# EAGLE board Avionis Final v14 (EAGLE 9.7.0)
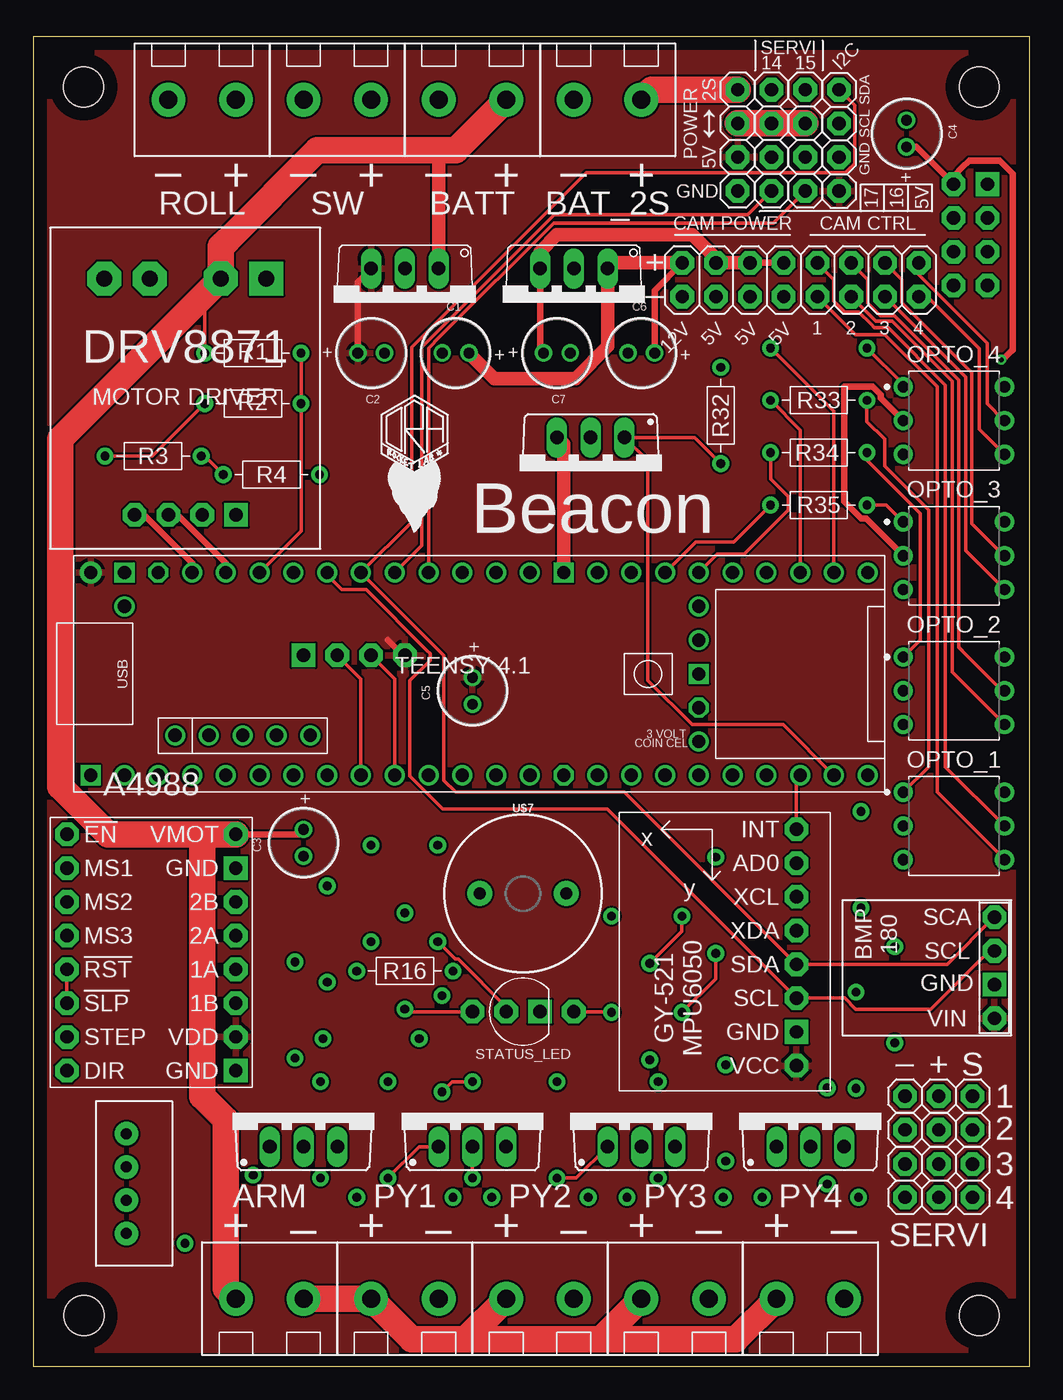
[diagram p0: board, top side]
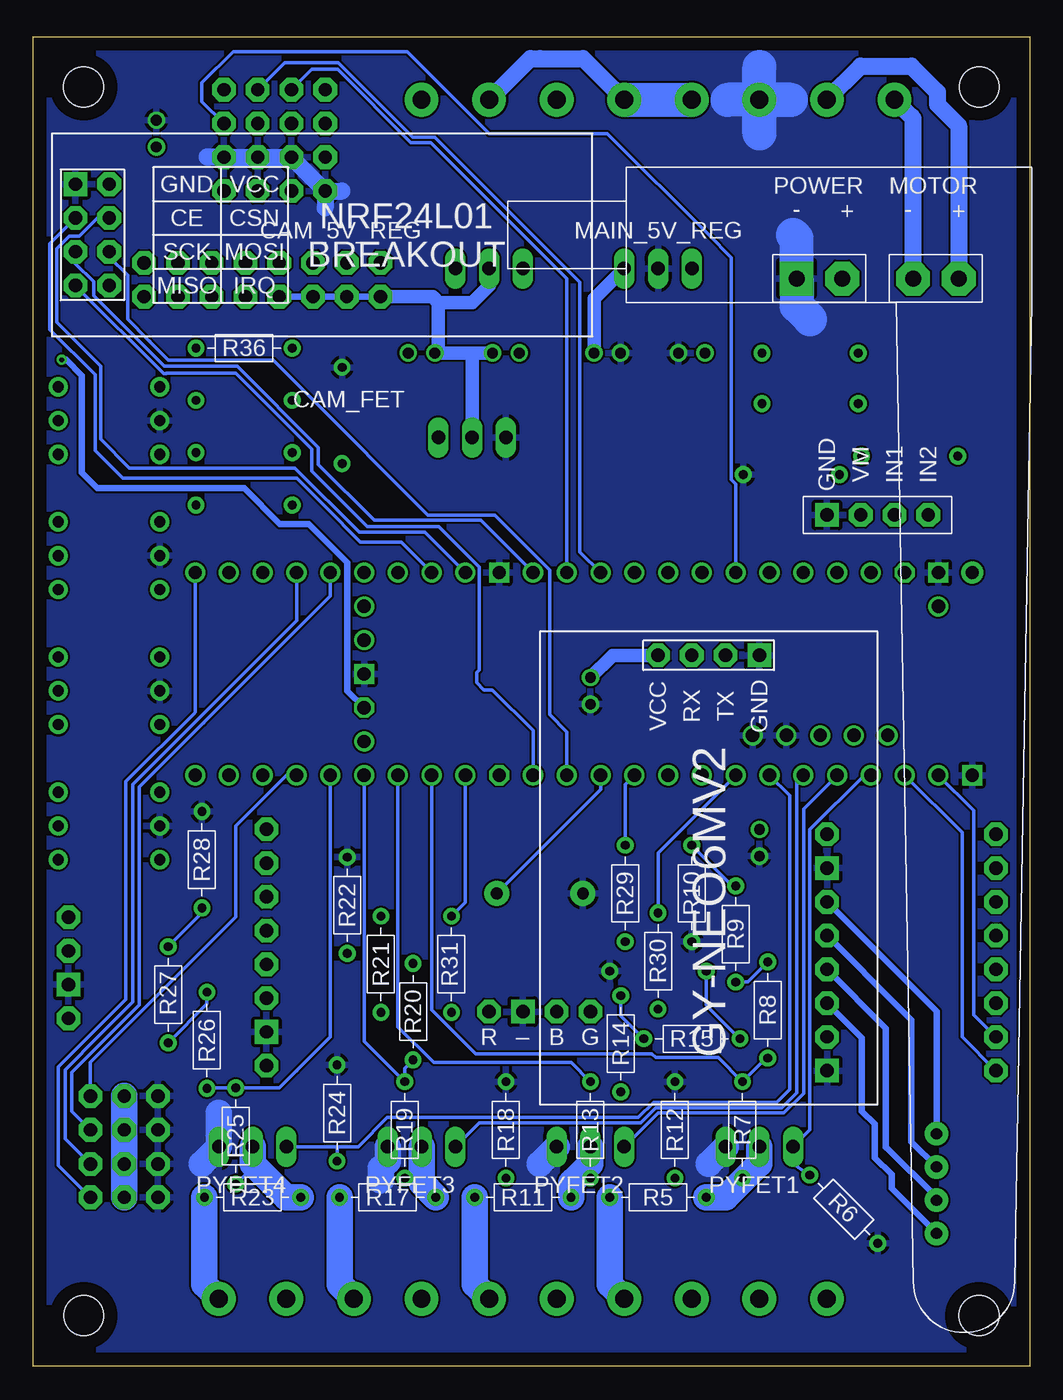
[diagram p1: board, bottom side, seen from below]

Size 74.91 x 100 mm. Coordinates in mm from the lower left corner, seen from the top.
Outline: 0,0 74.91,0 74.91,100 0,100 0,0
Copper layers (1*16): Top 0.035mm / dielectric 1.5mm / Bottom 0.035mm
Design rules "Fusion Electronics Design Rules": minimum track width 0.25mm, minimum drill 0.35mm, track to track 6mil, track to pad 6mil, pad to pad 6mil, via to via 6mil, smd to smd 6mil, copper to edge 40mil, drill to drill 6mil, minimum pad ring 10mil, minimum via ring 8mil, stop-mask expansion 4mil, vias tented up to drill 0mil, thermal gap 10mil
Holes 3 mm at 3.81,3.81 71.12,3.81 3.79,96.21 71.12,96.21

## Footprints (pad centres in the part's own frame; a part is rotated, then mirrored left to right if it is on the bottom)
TERMBLK_2_LOW = drill 1.35 pad 2.54: + 5.08,0; - 0,0
WCAP-AT1H_5X11(DXL) = drill 0.8: 1 1,0; 2 -1,0
TO220V = drill 1.016 long: 1 -2.54,-2.54; 2 0,-2.54; 3 2.54,-2.54
2X08 = drill 1 pad 1.778 octagon: 1 -8.89,-1.27; 2 -8.89,1.27; 3 -6.35,-1.27; 4 -6.35,1.27; 5 -3.81,-1.27; 6 -3.81,1.27; 7 -1.27,-1.27; 8 -1.27,1.27; 9 1.27,-1.27; 10 1.27,1.27; 11 3.81,-1.27; 12 3.81,1.27; 13 6.35,-1.27; 14 6.35,1.27; 15 8.89,-1.27; 16 8.89,1.27
TO220BV = drill 1.016 long: D 0,-2.54; G -2.54,-2.54; S 2.54,-2.54
1X04 = drill 1 pad 1.778 octagon: 1 -3.81,0; 2 -1.27,0; 3 1.27,0; 4 3.81,0
DIP762W60P254L712H480Q6B = drill 0.85 pad 1.45: 1 -3.81,2.54; 2 -3.81,0; 3 -3.81,-2.54; 4 3.81,-2.54; 5 3.81,0; 6 3.81,2.54
RESAD724W46L381D178B = drill 0.66 pad 1.26: 1 -3.62,0; 2 3.62,0
1X03 = drill 1 pad 1.778 octagon: 1 -2.54,0; 2 0,0; 3 2.54,0
LED_RGB_CAT_THT = drill 1 pad 1.778 square: - 1.27,0 | drill 1 pad 1.778 octagon: B -1.27,0; G -3.81,0; R 3.81,0
B4B-XH-A = drill 0.84 pad 1.778: 1 0,0; 2 2.5,0; 3 5,0; 4 7.5,0
GY-521 = drill 1 pad 1.778 octagon: ADO -8.89,-6.35; INT -8.89,-8.89; SCL -8.89,3.81; SDA -8.89,1.27; VCC -8.89,8.89; XCL -8.89,-3.81; XDA -8.89,-1.27 | drill 1 pad 1.778 square: GND -8.89,6.35
TENNSY41-E = drill 1: 0-RX1/CS1/CRX2 -27.94,-7.62; 1-TX1/MISO1/CTX2 -25.4,-7.62; 2-OUT2 -22.86,-7.62; 3-LRCLK2 -20.32,-7.62; 4-BCLK2 -17.78,-7.62; 5-IN2 -15.24,-7.62; 6-OUT1D -12.7,-7.62; 7-RX2/OUT1A -10.16,-7.62; 8-TX2/IN1 -7.62,-7.62; 9-OUT1C -5.08,-7.62; 10-CS\MQSR -2.54,-7.62; 11-MOSI/CTX1 0,-7.62; 12-MISO/MQSL 2.54,-7.62; 13-SCK/LED 2.54,7.62; 14-A0/TX3/SPDIF_OUT 0,7.62; 15-A1/RX3/SPDIF_IN -2.54,7.62; 16-A2/RX4/SCL1 -5.08,7.62; 17-A3/TX4/SDA1 -7.62,7.62; 18-A4/SDA0 -10.16,7.62; 19-A5/SCL0 -12.7,7.62; 20-A6/TX5/LRCLK1 -15.24,7.62; 21-A7/RX5/BCLK1 -17.78,7.62; 22-A8/CTX1 -20.32,7.62; 23-A9/CRX1/MCLK1 -22.86,7.62; 24-A10/TX6/SCL2 7.62,-7.62; 25-A11/RX6/SDA2 10.16,-7.62; 26-A12/MOSI1 12.7,-7.62; 27-A13/SCK1 15.24,-7.62; 28-RX7 17.78,-7.62; 29-TX7 20.32,-7.62; 30-CRX3 22.86,-7.62; 31-CTX3 25.4,-7.62; 32-OUT1B 27.94,-7.62; 33-MCLK2 27.94,7.62; 34-RX8 25.4,7.62; 35-TX8 22.86,7.62; 36-PWM 20.32,7.62; 37-PWM 17.78,7.62; 38-A14/CS/IN1 15.24,7.62; 39-A15/CS/OUT1A 12.7,7.62; 40-A16/CS1 10.16,7.62; 41-A17/MISO1 7.62,7.62; +5V -24.13,-4.62; DM -21.59,-4.62; DP -19.05,-4.62; GND4 -16.51,-4.62; GND5 -13.97,-4.62; ON/OFF 15.24,5.08; PROGRAM 15.24,2.54; VBAT 15.24,-5.08; VUSB -27.94,5.08 | drill 1 octagon: 3V3-1 5.08,-7.62; 3V3-2 15.24,-2.54; 3V3-3 -25.4,7.62 | drill 1 square: GND1 -30.48,-7.62; GND2 15.24,0; GND3 5.08,7.62; GND6 -27.94,7.62 | drill 1 pad 1.676: VIN -30.48,7.62
NRF24L01_BREAKOUT = drill 1 pad 1.778 octagon: CE 6.35,1.778; CSN 6.35,4.318; IRQ 11.43,4.318; MISO 11.43,1.778; MOSI 8.89,4.318; SCK 8.89,1.778; VCC 3.81,4.318 | drill 1 pad 1.778 square: GND 3.81,1.778
GY-NEO6MV2 = drill 1 pad 1.778 square: GND 8.89,1.778 | drill 1 pad 1.778 octagon: RX 13.97,1.778; TX 11.43,1.778; VCC 16.51,1.778
GY-68_BMP180 = drill 1 pad 1.778 square: GND 3.81,1.27 | drill 1 pad 1.778 octagon: SCL 6.35,1.27; SDA 8.89,1.27; VIN 1.27,1.27
DRV8871_MOTORDRIVER = drill 1 pad 1.778 square: GND 13.97,2.54 | drill 1 pad 1.778 octagon: IN1 8.89,2.54; IN2 6.35,2.54; VM 11.43,2.54 | drill 1.2 pad 2.54 octagon: MOT+ 4.064,20.32; MOT- 7.493,20.32; POWER+ 12.827,20.32 | drill 1.2 pad 2.54 square: POWER- 16.256,20.32
A4988 = drill 1 pad 1.778 octagon: 1A 6.35,-1.27; 1B 6.35,-3.81; 2A 6.35,1.27; 2B 6.35,3.81; !EN -6.35,8.89; !RST -6.35,-1.27; !SLP -6.35,-3.81; DIR -6.35,-8.89; MS1 -6.35,6.35; MS2 -6.35,3.81; MS3 -6.35,1.27; STEP -6.35,-6.35; VDD 6.35,-6.35; VMOT 6.35,8.89 | drill 1 pad 1.778 square: GND1 6.35,-8.89; GND2 6.35,6.35
BUZZER-12MM-KIT = drill 0.9 pad 1.88: + 3.25,0; - -3.25,0

## Placement (x,y rotation side)
ARM  TERMBLK_2  [TERMBLK_2_LOW]  20.32,5.08 180 top
BAT_2S  TERMBLK_2  [TERMBLK_2_LOW]  40.64,95.25 0 top
BATT  TERMBLK_2  [TERMBLK_2_LOW]  30.48,95.25 0 top
C1  10µF  [WCAP-AT1H_5X11(DXL)]  31.75,76.2 0 top
C2  1µF  [WCAP-AT1H_5X11(DXL)]  25.4,76.2 180 top
C3  100µF  [WCAP-AT1H_5X11(DXL)]  20.32,39.37 90 top
C4  10µF  [WCAP-AT1H_5X11(DXL)]  65.66,92.71 270 top
C5  10µF  [WCAP-AT1H_5X11(DXL)]  33.02,50.8 90 top
C6  10µF  [WCAP-AT1H_5X11(DXL)]  45.72,76.2 0 top
C7  1µF  [WCAP-AT1H_5X11(DXL)]  39.37,76.2 180 top
CAM_5V_REG  LM7805_TO220V  [TO220V]  40.64,80.01 180 top
CAM_BREAKOUTS  CAM_BK  [2X08]  57.69,81.71 0 top
CAM_FET  NMOSFET  [TO220BV]  41.91,67.31 180 top
I2C_BK  I2C  [1X04]  60.58,92.2 90 top
MAIN_5V_REG  LM7805_TO220V  [TO220V]  27.94,80.01 180 top
OPTO_1  4N28  [DIP762W60P254L712H480Q6B]  69.22,40.64 0 top
OPTO_2  4N28  [DIP762W60P254L712H480Q6B]  69.22,50.8 0 top
OPTO_3  4N28  [DIP762W60P254L712H480Q6B]  69.22,60.96 0 top
OPTO_4  4N28  [DIP762W60P254L712H480Q6B]  69.22,71.12 0 top
POWER_BK  POWER  [1X04]  52.96,92.2 270 top
PY1  TERMBLK_2  [TERMBLK_2_LOW]  30.48,5.08 180 top
PY2  TERMBLK_2  [TERMBLK_2_LOW]  40.64,5.08 180 top
PY3  TERMBLK_2  [TERMBLK_2_LOW]  50.8,5.08 180 top
PY4  TERMBLK_2  [TERMBLK_2_LOW]  60.96,5.08 180 top
PYFET1  NMOSFET  [TO220BV]  20.32,19.05 0 top
PYFET2  NMOSFET  [TO220BV]  33.02,19.05 0 top
PYFET3  NMOSFET  [TO220BV]  45.72,19.05 0 top
PYFET4  NMOSFET  [TO220BV]  58.42,19.05 0 top
R1  1M  [RESAD724W46L381D178B]  16.51,76.2 0 top
R2  100k  [RESAD724W46L381D178B]  16.51,72.39 0 top
R3  100k  [RESAD724W46L381D178B]  9.02,68.45 0 top
R4  100k  [RESAD724W46L381D178B]  17.91,67.06 180 top
R5  1ohm  [RESAD724W46L381D178B]  27.94,12.7 0 bottom
R6  470ohm  [RESAD724W46L381D178B]  13.97,11.81 315 bottom
R7  1M  [RESAD724W46L381D178B]  21.59,17.78 90 bottom
R8  100k  [RESAD724W46L381D178B]  19.68,26.8 270 bottom
R9  100k  [RESAD724W46L381D178B]  22.1,32.51 270 bottom
R10  100k  [RESAD724W46L381D178B]  25.4,35.56 90 bottom
R11  1ohm  [RESAD724W46L381D178B]  38.1,12.7 0 bottom
R12  470ohm  [RESAD724W46L381D178B]  26.67,17.78 90 bottom
R13  1M  [RESAD724W46L381D178B]  33.02,17.78 90 bottom
R14  100k  [RESAD724W46L381D178B]  30.73,24.26 270 bottom
R15  100k  [RESAD724W46L381D178B]  25.4,24.64 180 bottom
R16  100k  [RESAD724W46L381D178B]  27.94,29.72 180 top
R17  1ohm  [RESAD724W46L381D178B]  48.26,12.7 0 bottom
R18  470ohm  [RESAD724W46L381D178B]  39.37,17.78 90 bottom
R19  1M  [RESAD724W46L381D178B]  46.99,17.78 90 bottom
R20  100k  [RESAD724W46L381D178B]  46.35,26.67 270 bottom
R21  100k  [RESAD724W46L381D178B]  48.77,30.23 90 bottom
R22  100k  [RESAD724W46L381D178B]  51.31,34.67 270 bottom
R23  1ohm  [RESAD724W46L381D178B]  58.42,12.7 0 bottom
R24  470ohm  [RESAD724W46L381D178B]  52.07,19.05 90 bottom
R25  1M  [RESAD724W46L381D178B]  59.69,17.31 90 bottom
R26  100k  [RESAD724W46L381D178B]  61.85,24.51 270 bottom
R27  100k  [RESAD724W46L381D178B]  64.77,27.94 270 bottom
R28  100k  [RESAD724W46L381D178B]  62.23,38.1 270 bottom
R29  68ohm  [RESAD724W46L381D178B]  30.41,35.56 90 bottom
R30  68ohm  [RESAD724W46L381D178B]  27.94,30.48 90 bottom
R31  10ohm  [RESAD724W46L381D178B]  43.47,30.23 90 bottom
R32  470ohm  [RESAD724W46L381D178B]  51.69,71.5 90 top
R33  100ohm  [RESAD724W46L381D178B]  59.05,72.64 0 top
R34  100ohm  [RESAD724W46L381D178B]  59.05,68.71 0 top
R35  100ohm  [RESAD724W46L381D178B]  59.05,64.77 0 top
R36  100ohm  [RESAD724W46L381D178B]  59.05,76.58 180 bottom
ROLL  TERMBLK_2  [TERMBLK_2_LOW]  10.16,95.25 0 top
SERVO_BK_1  SERVO_1  [1X04]  55.5,92.2 270 top
SERVO_BK_2  SERVO_2  [1X04]  58.04,92.2 270 top
SERVO_HD_1  PINHD-1X3  [1X03]  68.07,20.32 0 top
SERVO_HD_2  PINHD-1X3  [1X03]  68.07,17.78 0 top
SERVO_HD_3  PINHD-1X3  [1X03]  68.07,15.21 0 top
SERVO_HD_4  PINHD-1X3  [1X03]  68.07,12.7 0 top
STATUS_LED  LED_RGB_CAT_THT  [LED_RGB_CAT_THT]  36.83,26.67 0 top
STEPPER_BK  STEPPER  [B4B-XH-A]  7,17.49 270 top
SW  TERMBLK_2  [TERMBLK_2_LOW]  20.32,95.25 0 top
U1  GY-521MPU6050  [GY-521]  48.49,31.5 180 top
U$1  TEENSY41-E  [TENNSY41-E]  34.8,52.07 0 top
U$2  NRF24L01_BREAKOUT  [NRF24L01_BREAKOUT]  73.51,92.71 270 bottom
U$3  GY-NEO6MV2  [GY-NEO6MV2]  11.43,55.24 180 bottom
U$4  GY-68_BMP180  [GY-68_BMP180]  73.53,24.89 90 top
U$5  DRV8871_MOTORDRIVER  [DRV8871_MOTORDRIVER]  1.27,61.49 0 top
U$6  A4988  [A4988]  8.88,31.11 0 top
U$7  BUZZER_12MM  [BUZZER-12MM-KIT]  36.83,35.56 0 top

## Library data of the parts
ARM BAT_2S BATT PY1-PY4 ROLL SW = TERMINAL BLOCK
C1-C7 = Wurth_Capacitors_WCAP-AT1H; DATASHEET-URL: https://www.we-online.com/catalog/datasheet/860240672002.pdf; DF: 10%; DIAMETER: 5mm; I-LEAK: 5uA; I-RIPPLE: 97mA; L: 11mm; OPERATING-TEMPERATURE: -40 °C up to +105 °C; PART-NUMBER: 860240672002; PITCH: 2mm; TECHNICAL-REFERENCE: ATDC110100M050DSPA3E000; VR: 50V(DC)
CAM_5V_REG MAIN_5V_REG = IC_Power-Management; CATEGORY: IC_Linear; DESCRIPTION: 5V Voltage Regulator; MANUFACTURER: Generic; MPN: Generic; SERIES: LM7805; SUB-CATEGORY: Voltage Regulator; TYPE: 5V
CAM_BREAKOUTS = My connectors; CATEGORY: Headers; DESCRIPTION: Header, Straight, 2x8 Position; MANUFACTURER: Generic; MPN: Generic; OPERATING_TEMPERATURE: Generic; PART_STATUS: Active; PITCH: 0.100" (2.54mm); ROHS_COMPLIANCE: Generic; SERIES: Generic; SUB-CATEGORY: Headers, Male Pins; TYPE: Board to Board or Cable, Unshrouded, Through Hole, Straight
CAM_FET PYFET1-PYFET4 = Transistor; CATEGORY: Transistor; SUB-CATEGORY: MOSFET; TYPE: N-Channel
I2C_BK POWER_BK SERVO_BK_1 SERVO_BK_2 = My connectors; CATEGORY: Headers; DESCRIPTION: Header, Straight, 4 Position; MANUFACTURER: Generic; MPN: Generic; OPERATING_TEMPERATURE: Generic; PART_STATUS: Active; PITCH: 0.100" (2.54mm); ROHS_COMPLIANCE: Generic; SERIES: Generic; SUB-CATEGORY: Headers, Male Pins; TYPE: Board to Board or Cable, Unshrouded, Through Hole, Straight
OPTO_1-OPTO_4 = Opto-Electronic; CATEGORY: Opto-Electronic; DESCRIPTION: Optoisolator Transistor with Base Output 5000Vrms Channel 6-DIP; MANUFACTURER: Vishay; MPN: 4N28; OPERATING_TEMP: - 55°C to + 100 °C; PART_STATUS: Active; ROHS_COMPLIANT: COMPLIANT; SERIES: 4N2x; SUB-CATEGORY: Optocoupler; THERMALLOSS: 0.150 W
R1-R36 = My Resistors and Pot; CATEGORY: Resistor; SUB-CATEGORY: Fixed
SERVO_HD_1-SERVO_HD_4 = My connectors; CATEGORY: Headers; DESCRIPTION: Header, Straight, 3 Position; MANUFACTURER: Generic; MPN: Generic; OPERATING_TEMPERATURE: Generic; PART_STATUS: Active; PITCH: 0.100" (2.54mm); ROHS_COMPLIANCE: Generic; SERIES: Generic; SUB-CATEGORY: Headers, Male Pins; TYPE: Board to Board or Cable, Unshrouded, Through Hole, Straight
STATUS_LED = LED_RGB_CAT
STEPPER_BK = My connectors; CATEGORY: Header; DSECRIPTION: Connector Header Through Hole 4 position 0.098" (2.50mm); MANUFACTURER: JST Sales America Inc.; MPN: B4B-XH-A(LF)(SN); OPERATING_TEMPERATURE: -25 C to 85 C; PART_STATUS: ACTIVE; PITCH: 0.098" (2.50mm); ROHS_COMPLIANCE: ROHS3 Compliant; SERIES: XH; SUB_CATEGORY: Rectangular Connectors; TYPE: Header, Male Pin, Board to Cable/Wire, Through Hole
U1 = GY-521_MPU6050
U$1 = TEENSY41
U$2 = NRF24L01_BREAKOUT
U$3 = GY-NEO6MV2
U$4 = GY-68_BMP180
U$5 = DRV8871_MOTORDRIVER
U$6 = A4988
U$7 = Buzzer 12mm Ora

## Nets
1A: STEPPER_BK.3 U$6.1A
1B: STEPPER_BK.4 U$6.1B
2A: STEPPER_BK.2 U$6.2A
2B: STEPPER_BK.1 U$6.2B
2S_BAT: BAT_2S.+ POWER_BK.1
3V3: C4.1 U$1.3V3-2 U$2.VCC
5V: C2.1 C5.1 I2C_BK.1 MAIN_5V_REG.3 POWER_BK.3 U1.VCC U$1.VIN U$3.VCC U$4.VIN U$6.VDD
5V_CAM: C7.1 CAM_5V_REG.3 CAM_BREAKOUTS.4 CAM_BREAKOUTS.6 CAM_BREAKOUTS.8
12V: ARM.+ BATT.+ C1.1 C3.1 C6.1 CAM_5V_REG.1 CAM_BREAKOUTS.2 MAIN_5V_REG.1 R1.1 U$5.POWER+ U$6.VMOT
12V_PYRO_SWITCH: ARM.- PY1.+ PY2.+ PY3.+ PY4.+
!RST: U$6.!RST U$6.!SLP
BATT-: BAT_2S.- BATT.- SW.+
BRK_14: SERVO_BK_1.1 U$1.14-A0/TX3/SPDIF_OUT
BRK_15: SERVO_BK_2.1 U$1.15-A1/RX3/SPDIF_IN
BRK_16: SERVO_BK_2.4 U$1.16-A2/RX4/SCL1
BRK_17: SERVO_BK_1.4 U$1.17-A3/TX4/SDA1
BUZZER: U$1.10-CS\MQSR U$7.+
CAM1: R33.1 U$1.35-TX8
CAM1+: CAM_BREAKOUTS.10 OPTO_1.5
CAM1-: CAM_BREAKOUTS.9 OPTO_1.4
CAM2: R34.1 U$1.38-A14/CS/IN1
CAM2+: CAM_BREAKOUTS.12 OPTO_2.5
CAM2-: CAM_BREAKOUTS.11 OPTO_2.4
CAM3: R35.1 U$1.39-A15/CS/OUT1A
CAM3+: CAM_BREAKOUTS.14 OPTO_3.5
CAM3-: CAM_BREAKOUTS.13 OPTO_3.4
CAM4: R36.1 U$1.34-RX8
CAM4+: CAM_BREAKOUTS.16 OPTO_4.5
CAM4-: CAM_BREAKOUTS.15 OPTO_4.4
CAM_ON: CAM_FET.G R32.1 U$1.31-CTX3
CE: U$1.40-A16/CS1 U$2.CE
CSN: U$1.41-A17/MISO1 U$2.CSN
DIR: U$1.1-TX1/MISO1/CTX2 U$6.DIR
GND: C1.2 C2.2 C3.2 C4.2 C5.2 CAM_FET.S I2C_BK.2 MAIN_5V_REG.2 OPTO_1.2 OPTO_2.2 OPTO_3.2 OPTO_4.2 POWER_BK.4 PYFET1.S PYFET2.S PYFET3.S PYFET4.S R4.1 R6.2 R10.1 R12.2 R16.1 R18.2 R22.1 R24.2 R28.1 R32.2 SERVO_BK_1.3 SERVO_BK_2.3 SERVO_HD_1.1 SERVO_HD_2.1 SERVO_HD_3.1 SERVO_HD_4.1 STATUS_LED.- SW.- U1.GND U$1.GND1 U$1.GND2 U$1.GND3 U$1.GND4 U$1.GND5 U$1.GND6 U$2.GND U$3.GND U$4.GND U$5.GND U$5.POWER- U$6.GND1 U$6.GND2 U$7.-
GND_CAM: C6.2 C7.2 CAM_5V_REG.2 CAM_BREAKOUTS.1 CAM_BREAKOUTS.3 CAM_BREAKOUTS.5 CAM_BREAKOUTS.7 CAM_FET.D
LED_BLU: R29.2 U$1.9-OUT1C
LED_GRE: R30.2 U$1.6-OUT1D
LED_RED: R31.2 U$1.24-A10/TX6/SCL2
MISO: U$1.12-MISO/MQSL U$2.MISO
MOSI: U$1.11-MOSI/CTX1 U$2.MOSI
MOT_1: U$1.22-A8/CTX1 U$5.IN1
MOT_2: U$1.23-A9/CRX1/MCLK1 U$5.IN2
MPU_INT: U1.INT U$1.30-CRX3
N$1: ROLL.+ U$5.MOT+
N$2: ROLL.- U$5.MOT-
N$3: PY2.- R11.1
N$4: PYFET2.D R11.2 R13.1
N$5: R15.1 R16.2
N$6: R14.1 R15.2
N$7: PY3.- R17.1
N$8: PY1.- R5.1
N$9: R9.1 R10.2
N$10: PYFET1.D R5.2 R7.1
N$11: R2.1 R3.1
N$12: R3.2 R4.2
N$13: R8.1 R9.2
N$14: PYFET3.D R17.2 R19.1
N$15: R21.1 R22.2
N$16: R20.1 R21.2
N$17: PY4.- R23.1
N$18: PYFET4.D R23.2 R25.1
N$19: R27.1 R28.2
N$20: R26.1 R27.2
N$21: R30.1 STATUS_LED.G
N$22: R31.1 STATUS_LED.R
N$23: OPTO_1.1 R33.2
N$24: R29.1 STATUS_LED.B
N$25: OPTO_2.1 R34.2
N$26: OPTO_3.1 R35.2
N$27: OPTO_4.1 R36.2
PY_CTY1: R7.2 R8.2 U$1.25-A11/RX6/SDA2
PY_CTY2: R13.2 R14.2 U$1.26-A12/MOSI1
PY_CTY3: R19.2 R20.2 U$1.27-A13/SCK1
PY_CTY4: R25.2 R26.2 U$1.28-RX7
PYRO1: PYFET1.G R6.1 U$1.2-OUT2
PYRO2: PYFET2.G R12.1 U$1.3-LRCLK2
PYRO3: PYFET3.G R18.1 U$1.4-BCLK2
PYRO4: PYFET4.G R24.1 U$1.5-IN2
RX: U$1.7-RX2/OUT1A U$3.TX
SCK: U$1.13-SCK/LED U$2.SCK
SCL: I2C_BK.3 U1.SCL U$1.19-A5/SCL0 U$4.SCL
SDA: I2C_BK.4 U1.SDA U$1.18-A4/SDA0 U$4.SDA
SERVO_1: SERVO_HD_1.3 U$1.29-TX7
SERVO_2: SERVO_HD_2.3 U$1.37-PWM
SERVO_3: SERVO_HD_3.3 U$1.36-PWM
SERVO_4: SERVO_HD_4.3 U$1.33-MCLK2
SERVO_POW: SERVO_HD_1.2 SERVO_HD_2.2 SERVO_HD_3.2 SERVO_HD_4.2
SERVO_V: POWER_BK.2 SERVO_BK_1.2 SERVO_BK_2.2
STEP: U$1.0-RX1/CS1/CRX2 U$6.STEP
TX: U$1.8-TX2/IN1 U$3.RX
V_BATT: R1.2 R2.2 U$1.21-A7/RX5/BCLK1

## Tracks (layer width: path | path; a pad name or v marks a point on that pad's centre or on a via)
1A
  Bottom 0.5: U$6.1A 10.81,25.43 10.81,16.51 | 10.81,16.51 10.81,16.46 | 10.81,16.51 7,12.7 STEPPER_BK.3
1B
  Bottom 0.5: U$6.1B 12.61,24.68 12.61,19.19 11.65,18.23 11.65,15.69 10.38,14.42 10.38,13.37 STEPPER_BK.4
2A
  Bottom 0.5: U$6.2A 9.65,26.81 9.65,26.8 8.89,26.04 8.89,16.88 STEPPER_BK.2
2B
  Bottom 0.5: U$6.2B 7,26.7 STEPPER_BK.1
2S_BAT
  Top 2: BAT_2S.+ 46.48,96.01 POWER_BK.1
3V3  (via drill 0.35)
  Top 0.5: C4.1 66.39,91.71 U$2.VCC 69.19,89.52 69.85,90.17 70.36,90.68 72.64,90.68 73.64,89.68 73.64,77.47 73.64,76.45 | 73.64,76.45 73.64,76.44 | 73.64,76.45 72.88,75.69 v72.77,75.69
  Bottom 0.5: U$1.3V3-2 51.31,50.8 51.31,60.45 54.21,63.36 56.37,63.36 59.05,66.04 70.1,66.04 71.26,67.2 71.26,74.51 72.45,75.69 v72.77,75.69
5V
  Top 0.5: MAIN_5V_REG.3 24.4,81.55 C2.1 | U$3.VCC 27.81,53.47 26.67,54.61
  Bottom 1: U$3.VCC 31.35,53.47 C5.1
  pour Top: -2.29,97.54 -2.29,5.33 3.86,5.33 3.95,5.29 4.02,5.22 4.06,5.13 4.06,0.25 70.87,0.25 70.87,5.13 70.91,5.22 70.98,5.29 71.07,5.33 75.95,5.33 75.95,97.54 71.07,97.54 70.98,97.58 70.91,97.65 70.87,97.74 70.87,101.35 4.06,101.35 4.06,97.74 4.02,97.65 3.95,97.58 3.86,97.54
5V_CAM
  Top 0.5: CAM_BREAKOUTS.6 CAM_BREAKOUTS.8 | 38.37,82.28 CAM_5V_REG.3 38.1,76.47 C7.1
  Top 1: CAM_BREAKOUTS.6 CAM_BREAKOUTS.4 51.34,83.28 49.53,85.09 39.37,85.09 38.1,83.82 CAM_5V_REG.3
12V
  Top 0.25: R1.1 12.89,80.6 U$5.POWER+
  Top 0.5: C6.1 46.72,80.91 CAM_BREAKOUTS.2 | U$6.VMOT 19.95,40.01 C3.1
  Top 1: 30.48,91.44 MAIN_5V_REG.1 | CAM_BREAKOUTS.2 43.61,82.98 CAM_5V_REG.1 43.18,76.71 40.77,74.3 34.66,74.3 C1.1
  Top 2: BATT.+ 31.75,91.44 30.48,91.44 24.13,91.44 21.34,91.44 14.61,84.71 14.1,84.2 U$5.POWER+ 2.02,69.72 2.02,44.45 2.02,43.61 5.62,40.01 12.7,40.01 | 12.7,40.01 U$6.VMOT | 12.7,40.01 12.7,20.3 14.46,18.54 14.46,11.94 14.46,5.86 ARM.+
  Bottom 1: MAIN_5V_REG.1 32.75,80.28 C1.1
12V_PYRO_SWITCH
  Top 2: ARM.- PY1.+ 28.46,2.02 30.48,2.02 | 30.48,2.02 41.91,2.02 | 41.91,2.02 52.07,2.02 52.82,2.02 PY4.+ | PY3.+ 42.66,2.02 41.91,2.02 | PY2.+ 32.5,2.02 30.48,2.02
!RST
  Top 0.25: U$6.!RST U$6.!SLP
BATT-
  Bottom 1.27: BAT_2S.- 37.54,98.35 36.83,98.35 33.58,98.35 BATT.-
  Bottom 2.54: BATT.- SW.+
BRK_14
  Bottom 0.25: SERVO_BK_1.1 53.98,97.54 53.21,97.54 52.03,97.54 46.53,92.03 45.04,92.03 34.92,81.92 34.8,81.79 U$1.14-A0/TX3/SPDIF_OUT
BRK_15
  Bottom 0.25: SERVO_BK_2.1 56.01,98.04 53.21,98.04 51.97,98.04 46.36,92.43 44.72,92.43 34.57,82.27 33.82,81.53 33.82,61.25 U$1.15-A1/RX3/SPDIF_IN
BRK_16
  Top 0.25: U$1.16-A2/RX4/SCL1 29.72,76.53 29.72,76.58 30.57,77.44 39.12,85.98 53.34,85.98 55.63,85.98 SERVO_BK_2.4
BRK_17
  Top 0.25: U$1.17-A3/TX4/SDA1 29.21,61.72 29.21,76.64 30.26,77.69 39.18,86.61 39.62,86.61 53.72,86.61 SERVO_BK_1.4
BUZZER
  Bottom 0.25: U$7.+ 32.26,43.38 U$1.10-CS\MQSR
CAM1
  Top 0.25: R33.1 57.66,70.42 U$1.35-TX8
CAM1+
  Top 0.25: CAM_BREAKOUTS.10 60.2,81.74 60.2,81.41 60.2,80.09 61.01,79.28 62.08,79.28 62.99,78.36 63.25,78.11 64.26,78.11 68.58,73.79 68.58,73.53 68.58,68.2 68.58,45.09 OPTO_1.5
CAM1-
  Top 0.25: OPTO_1.4 67.94,43.18 67.94,71.12 67.94,73.36 67.94,73.66 64.01,77.6 61.8,77.6 CAM_BREAKOUTS.9
CAM2
  Top 0.25: R34.1 55.44,66.74 56.77,65.41 56.77,64.39 53.47,61.09 52.2,61.09 51.44,61.09 U$1.38-A14/CS/IN1
CAM2+
  Top 0.25: OPTO_2.5 72.85,50.8 70.08,53.57 | 70.08,53.57 69.67,53.98 | CAM_BREAKOUTS.12 62.74,81.74 62.74,81.41 62.74,79.96 63.68,79.02 64.74,79.02 69.6,74.17 69.6,54.05 70.08,53.57
CAM2-
  Top 0.25: OPTO_2.4 69.09,52.2 69.09,74.11 69.06,74.14 64.58,78.61 64.52,78.61 63.33,78.61 CAM_BREAKOUTS.11
CAM3
  Top 0.25: R35.1 52.66,61.99 50.88,61.99 49.8,61.99 U$1.39-A15/CS/OUT1A
CAM3+
  Top 0.25: OPTO_3.5 72.98,60.96 70.56,63.37 70.56,74.17 70.56,74.72 70.48,74.8 65.28,80.01 65.28,81.41 65.28,81.74 CAM_BREAKOUTS.14
CAM3-
  Top 0.25: OPTO_3.4 70.1,61.34 70.1,74.17 70.1,74.37 CAM_BREAKOUTS.13
CAM4
  Top 0.25: R36.1 58.39,73.63 | 58.39,73.63 58.93,73.09 | 58.39,73.63 60.2,71.82 U$1.34-RX8
CAM4+
  Top 0.25: OPTO_4.5 72.98,71.12 71.71,72.39 71.71,76.96 66.58,82.09 CAM_BREAKOUTS.16
CAM4-
  Top 0.25: CAM_BREAKOUTS.15 67.21,80.44 71.12,76.53 71.12,74.17 71.12,70.48 OPTO_4.4
CAM_ON
  Top 0.25: R32.1 49.72,69.85 CAM_FET.G 46.2,68.1 46.2,59.56 46.2,51.59 49.53,48.26 54.61,48.26 56.39,48.26 U$1.31-CTX3
CE
  Bottom 0.25: U$2.CE 73.66,84.44 73.66,77.98 70.25,74.57 70.25,68.86 68.2,66.8 59.69,66.8 | 59.69,66.8 59.05,66.8 | 59.69,66.8 55.12,66.8 52.96,64.64 50.31,61.99 48.34,61.99 47.26,61.99 U$1.40-A16/CS1
CSN
  Bottom 0.25: U$2.CSN 70.08,86.36 71.46,84.99 72.22,84.99 73.16,84.05 73.16,78.51 69.85,75.2 69.85,74.93 69.85,69.72 67.69,67.56 55.24,67.56 50.42,62.74 49.78,62.74 45.47,62.74 U$1.41-A17/MISO1
DIR
  Bottom 0.25: U$6.DIR 5.08,24.77 5.08,27.94 5.08,40.13 U$1.1-TX1/MISO1/CTX2
GND
  Top 0.5: OPTO_3.2 62.63,63.74 62.25,63.74 60.96,65.03 60.96,73.66 62.23,73.66 62.25,73.68 63.1,73.68 63.71,73.07 63.71,72.82 OPTO_4.2
  Top 1: CAM_FET.S 39.88,69.34 U$1.GND3
  Bottom 1.27: POWER_BK.4 SERVO_BK_1.3 SERVO_BK_2.3 I2C_BK.2 61.85,90.93 | POWER_BK.4 51.69,88.39 | POWER_BK.4 52.96,87.12
  Bottom 2: 36.83,15.24 PYFET2.S | 24.13,15.24 PYFET1.S | 60.96,19.05 PYFET4.S 62.23,15.24 | PYFET3.S 48.26,15.41 48.77,14.9 48.77,13.97
  Bottom 2.54: SW.- 17.93,95.25 SW.- | SW.- 22.71,95.25 | SW.- 20.32,92.71 SW.- | SW.- 20.32,97.71 | 17.78,85.09 17.53,84.84 U$5.POWER- 17.53,79.76 16.51,78.74
  pour Bottom: -2.29,96.27 -2.29,4.06 3.86,4.06 3.95,4.02 4.02,3.95 4.06,3.86 4.06,-1.02 70.87,-1.02 70.87,3.86 70.91,3.95 70.98,4.02 71.07,4.06 75.95,4.06 75.95,96.27 71.07,96.27 70.98,96.31 70.91,96.38 70.87,96.47 70.87,100.08 4.06,100.08 4.06,96.47 4.02,96.38 3.95,96.31 3.86,96.27
GND_CAM
  Bottom 0.5: CAM_BREAKOUTS.1 CAM_BREAKOUTS.3 CAM_BREAKOUTS.5 CAM_BREAKOUTS.7
  Bottom 1: CAM_BREAKOUTS.1 44.88,80.44 44.45,80.01 | 44.45,80.01 41.91,80.01 40.64,81.28 CAM_5V_REG.2 | 44.45,80.01 44.45,76.47 C6.2 41.91,76.2 | C7.2 41.91,76.2 | CAM_FET.D 41.91,76.2
LED_BLU
  Bottom 0.25: U$1.9-OUT1C 30.41,43.76 R29.2
LED_GRE
  Bottom 0.25: U$1.6-OUT1D 27.94,38.61 R30.2
LED_RED
  Bottom 0.25: R31.2 42.42,34.9 U$1.24-A10/TX6/SCL2
MISO
  Bottom 0.25: 63.5,74.68 59.69,74.68 53.98,68.96 53.98,67.33 49.78,63.14 44.41,63.14 41.39,60.12 41.39,52.37 41.57,52.19 41.57,51.41 41.03,50.87 40.39,50.87 37.34,47.81 U$1.12-MISO/MQSL | 63.5,74.68 63.63,74.68 | 63.5,74.68 64.9,74.68 64.91,74.66 65.12,74.66 U$2.MISO
MOSI
  Bottom 0.25: U$2.MOSI 69.19,83.42 67.82,82.04 67.82,78.74 66.29,77.22 | 66.29,77.22 66.17,77.09 | 66.29,77.22 64.75,75.67 62.3,75.67 56.88,75.67 54.36,73.15 45.23,64.03 40.22,64.03 36.08,59.89 36.08,49.01 34.8,47.72 U$1.11-MOSI/CTX1
MOT_1
  Top 0.5: U$1.22-A8/CTX1 14.48,60.42 10.87,64.03 U$5.IN1
MOT_2
  Top 0.5: U$1.23-A9/CRX1/MCLK1 11.94,60.42 8.33,64.03 U$5.IN2
MPU_INT
  Top 0.25: U1.INT 57.38,44.17 U$1.30-CRX3
N$1
  Bottom 1.27: ROLL.+ 12.7,97.79 8.89,97.79 6.94,95.84 6.94,94.91 5.33,93.31 U$5.MOT+
N$2
  Bottom 1.27: U$5.MOT- 8.76,93.85 8.89,93.98 ROLL.-
N$3
  Bottom 2: R11.1 41.72,6.16 PY2.-
N$4
  Top 0.25: R13.1 PYFET2.D
  Bottom 2: PYFET2.D 33.02,15.24 34.29,13.97 34.48,13.78 R11.2
N$5
  Bottom 0.25: R15.1 23.81,26.67 24.32,27.18 R16.2
N$6
  Bottom 0.25: R15.2 30.73,26.35 R14.1
N$7
  Bottom 2: R17.1 51.88,6.16 PY3.-
N$8
  Bottom 2: R5.1 31.56,6.16 PY1.-
N$9
  Bottom 0.25: R10.2 22.35,36.13 R9.1
N$10
  Bottom 0.25: R7.1 20.32,15.43 PYFET1.D
  Bottom 2: R5.2 22.86,12.7 20.32,15.24 20.32,15.43 PYFET1.D
N$11
  Top 0.25: R2.1 8.95,68.45 R3.1
N$12
  Top 0.25: R3.2 12.89,68.45 R4.2
N$13
  Bottom 0.25: R9.2 21.21,28.89 R8.1
N$14
  Bottom 0.25: R19.1 45.72,15.43 PYFET3.D
  Bottom 2: PYFET3.D 45.72,15.43 45.72,13.78 R17.2
N$15
  Top 0.25: R22.2 51.31,29.15 R21.1
N$16
  Top 0.25: R21.2 48.77,32.7 R20.1
N$17
  Bottom 2: R23.1 62.04,6.16 PY4.-
N$18
  Bottom 0.25: R25.1 58.42,14.96 PYFET4.D
  Bottom 2: R23.2 55.88,12.7 58.42,15.24 PYFET4.D
N$19
  Bottom 0.25: R27.1 62.23,34.1 R28.2
N$20
  Bottom 0.25: R27.2 61.85,27.24 R26.1
N$21
  Top 0.25: STATUS_LED.G 28.13,26.67 R30.1
N$22
  Top 0.25: STATUS_LED.R 43.41,26.67 R31.1
N$23
  Top 0.25: R33.2 62.67,71.06 64.01,69.72 64.01,67.94 64.01,67.69 67.31,64.39 67.31,45.09 OPTO_1.1
N$24
  Top 0.25: R29.1 31.73,30.62 31.94,30.62 35.56,27 STATUS_LED.B
N$25
  Top 0.25: R34.2 62.67,68.14 66.67,64.14 66.67,54.61 OPTO_2.1
N$26
  Top 0.25: R35.2 64.14,64.77 OPTO_3.1
N$27
  Top 0.25: R36.2 65.41,73.85 OPTO_4.1
PY_CTY1
  Bottom 0.25: U$1.25-A11/RX6/SDA2 44.96,26.81 41.64,23.49 28.4,23.49 28.13,23.22 23.41,23.22 R7.2 19.81,23.18 R8.2
PY_CTY2
  Top 0.25: R13.2 31.5,21.4 R14.2
  Bottom 0.25: R13.2 34.46,22.84 44.81,22.84 47.5,25.53 U$1.26-A12/MOSI1
PY_CTY3
  Bottom 0.25: U$1.27-A13/SCK1 50.04,24.45 R19.2 46.99,22.41 R20.2
PY_CTY4
  Bottom 0.25: 55.12,22.23 55.18,22.16 | 55.18,22.16 56.41,20.93 R25.2 61.8,20.93 R26.2 | 55.18,22.16 52.58,24.77 U$1.28-RX7
PYRO1
  Bottom 0.25: U$1.2-OUT2 12.43,44.45 16.52,40.36 16.52,17.77 PYFET1.G 17.78,15.24 R6.1
PYRO2
  Top 0.25: R12.1 29.02,16.51 PYFET2.G
  Bottom 0.25: PYFET2.G 27.94,19.05 18.48,19.05 17,20.53 17,41.93 U$1.3-LRCLK2
PYRO3
  Top 0.25: R18.1 40.83,14.16 PYFET3.G
  Bottom 0.25: U$1.4-BCLK2 17.53,43.94 17.53,20.57 18.65,19.45 28.11,19.45 29.25,18.31 41.38,18.31 PYFET3.G
PYRO4
  Bottom 0.25: PYFET4.G 52.07,16.51 | 52.07,16.51 50.49,16.51 48.29,18.71 29.41,18.71 28.27,19.86 19.01,19.86 18.03,20.83 18.03,42.93 U$1.5-IN2 | R24.1 52.07,16.51
RX
  Top 0.25: U$3.TX 24.64,51.69 U$1.7-RX2/OUT1A
SCK
  Bottom 0.25: U$2.SCK 71.73,82.93 70.36,81.56 70.36,80.52 65.05,75.2 62.36,75.2 59.58,75.2 53.47,69.09 53.47,67.82 49.28,63.63 48.39,63.63 41.27,63.63 U$1.13-SCK/LED
SCL
  Top 0.25: U$4.SCL 71.88,31.24 67.48,26.84 61.85,26.84 61.01,27.69 U1.SCL 43.16,41.91 31.75,41.91 30.8,41.91 28.32,44.39 28.32,45.72 28.32,51.56 29.84,53.09 29.84,53.59 29.59,53.85 25.03,58.41 23.2,58.41 22.1,59.5 U$1.19-A5/SCL0
  Bottom 0.25: U$1.19-A5/SCL0 22.1,66.34 22.43,66.68 22.43,83.39 24.13,85.09 31.75,92.71 40.64,92.71 46.79,98.86 46.99,98.86 59.89,98.86 62.23,96.52 62.23,95.12 I2C_BK.3
SDA
  Top 0.25: U$4.SDA 68.71,30.23 U1.SDA 44.43,43.18 31.75,43.18 30.86,44.07 30.86,51.94 30.86,53.47 U$1.18-A4/SDA0 28.45,63.5 28.45,76.65 29.24,77.44 | 29.24,77.44 29.81,78.01 | 29.24,77.44 41.57,89.77 61.06,89.77 61.21,89.92 61.74,90.45 61.74,94.85 I2C_BK.4
SERVO_1
  Bottom 0.25: SERVO_HD_1.3 70.61,22.86 66.55,26.92 59.69,33.78 59.69,40.64 55.88,44.45 U$1.29-TX7
SERVO_2
  Bottom 0.25: SERVO_HD_2.3 72.01,19.18 72.01,21.08 72.01,22.1 69.6,24.51 66.93,27.18 66.93,42.8 66.93,43.56 62.23,48.26 | 62.23,48.26 62.1,48.39 | 62.23,48.26 52.58,57.91 U$1.37-PWM
SERVO_3
  Bottom 0.25: SERVO_HD_3.3 72.52,17.12 72.52,21.08 72.52,22.31 69.95,24.87 67.44,27.39 67.44,42.8 67.44,43.77 62.59,48.62 55.12,56.09 U$1.36-PWM
SERVO_4
  Bottom 0.25: SERVO_HD_4.3 73.03,15.11 73.03,21.08 73.03,22.52 70.31,25.23 67.94,27.6 67.94,42.8 67.94,43.98 62.82,49.1 62.74,49.19 U$1.33-MCLK2
SERVO_POW
  Bottom 2: SERVO_HD_1.2 SERVO_HD_2.2 SERVO_HD_3.2 SERVO_HD_4.2
SERVO_V
  Top 2: POWER_BK.2 SERVO_BK_1.2 SERVO_BK_2.2
STEP
  Bottom 0.25: U$6.STEP 4.19,26.43 4.19,27.3 4.19,41.78 U$1.0-RX1/CS1/CRX2
TX
  Top 0.25: U$3.RX 27.18,51.69 U$1.8-TX2/IN1
V_BATT
  Top 0.25: R1.2 R2.2 20.13,62.8 U$1.21-A7/RX5/BCLK1

## Text on the board
tPlace: SERVI | I2C | 14 | 15 | 2S | SDA | POWER | ↔ | SCL | 5V | GND | GND | 17 | 16 | 5V | CAM POWER | CAM CTRL | + | – | 12V | 5V | 5V | 5V | 1 | 2 | 3 | 4 | Beacon | – | + | S | 1 | 2 | 3 | 4 | SERVI